# Altium PCB RacerPCB.PcbDoc (part 1 of 2)
Units mm, origin at the board's own origin, x right, y up, seen from the top; angles counter-clockwise.
Board outline 64 x 85 mm, 4 copper layers (Top Side, Ground Plane, Power Plane, Bottom Side), stack 0.844 mm thick; 111 components, 67 nets, 320 pads, 84 vias.
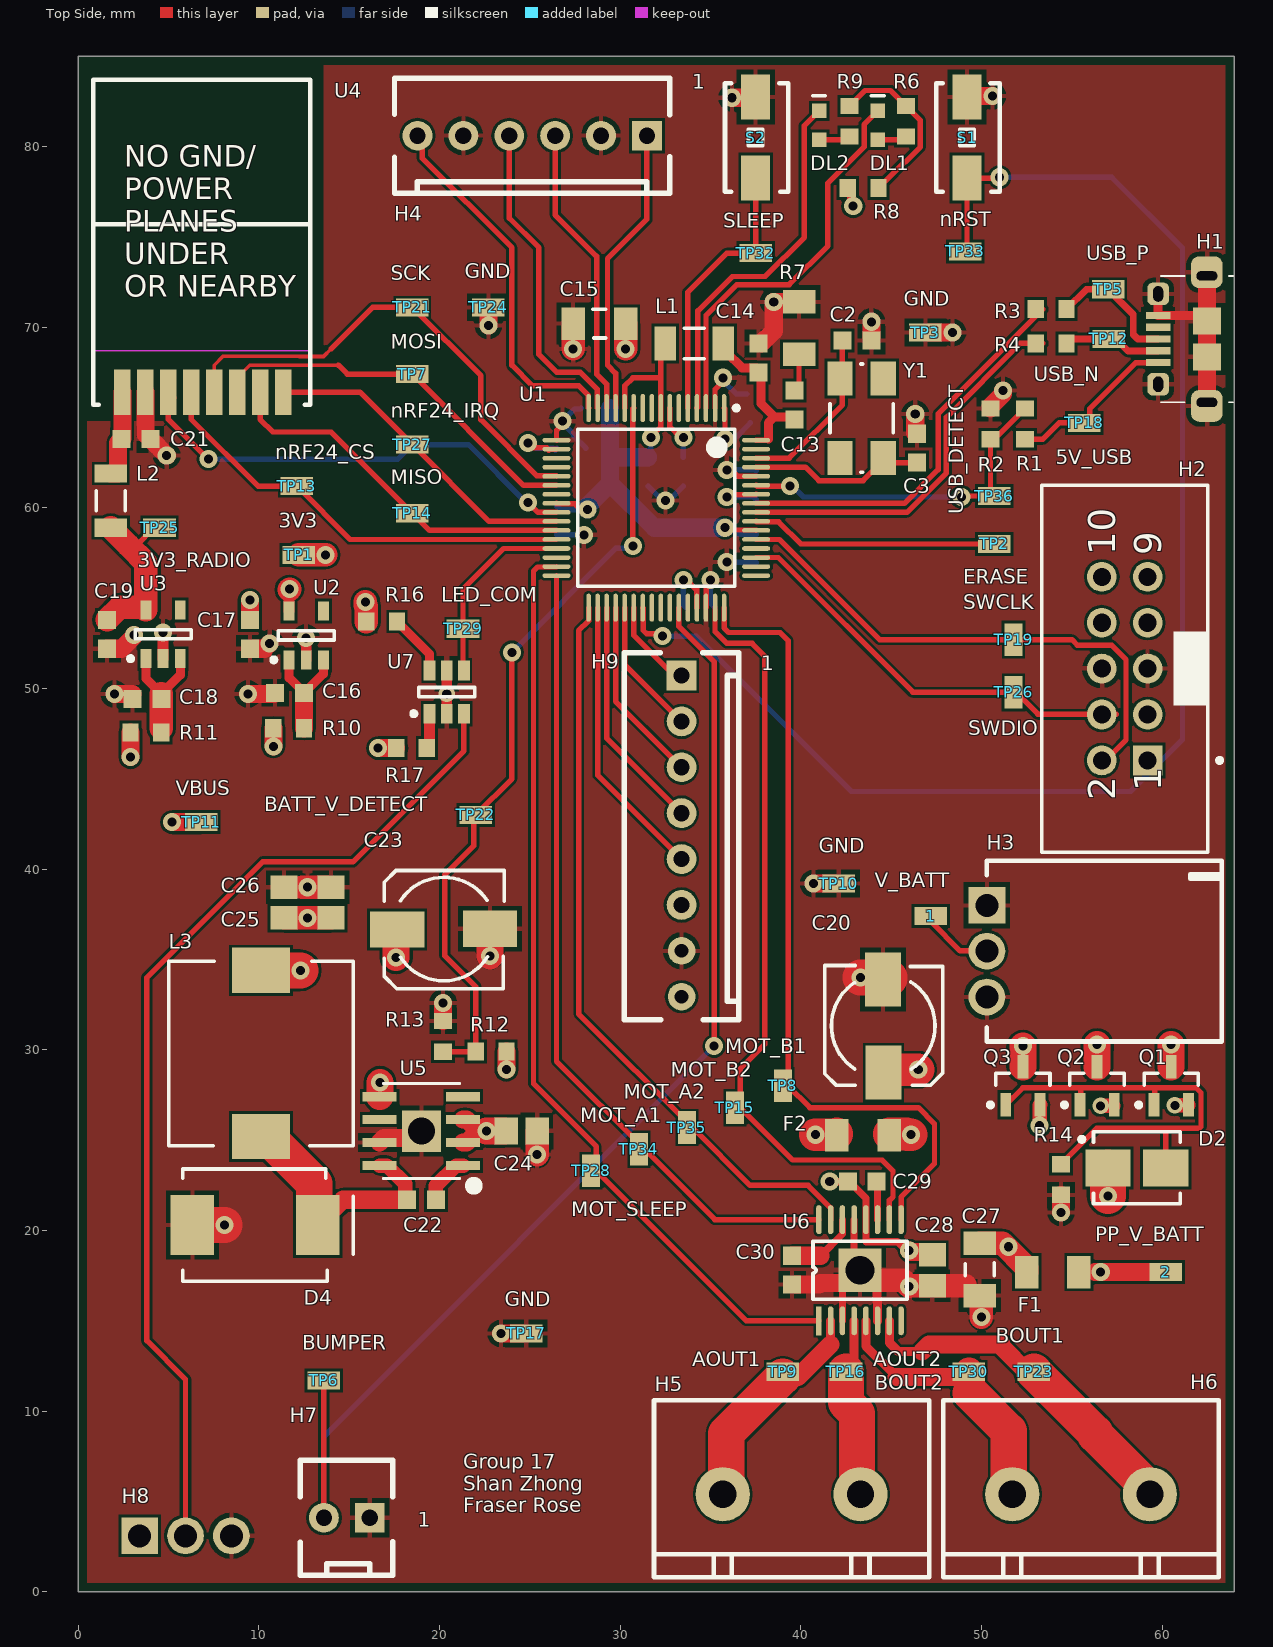
[diagram p0: Top Side view]
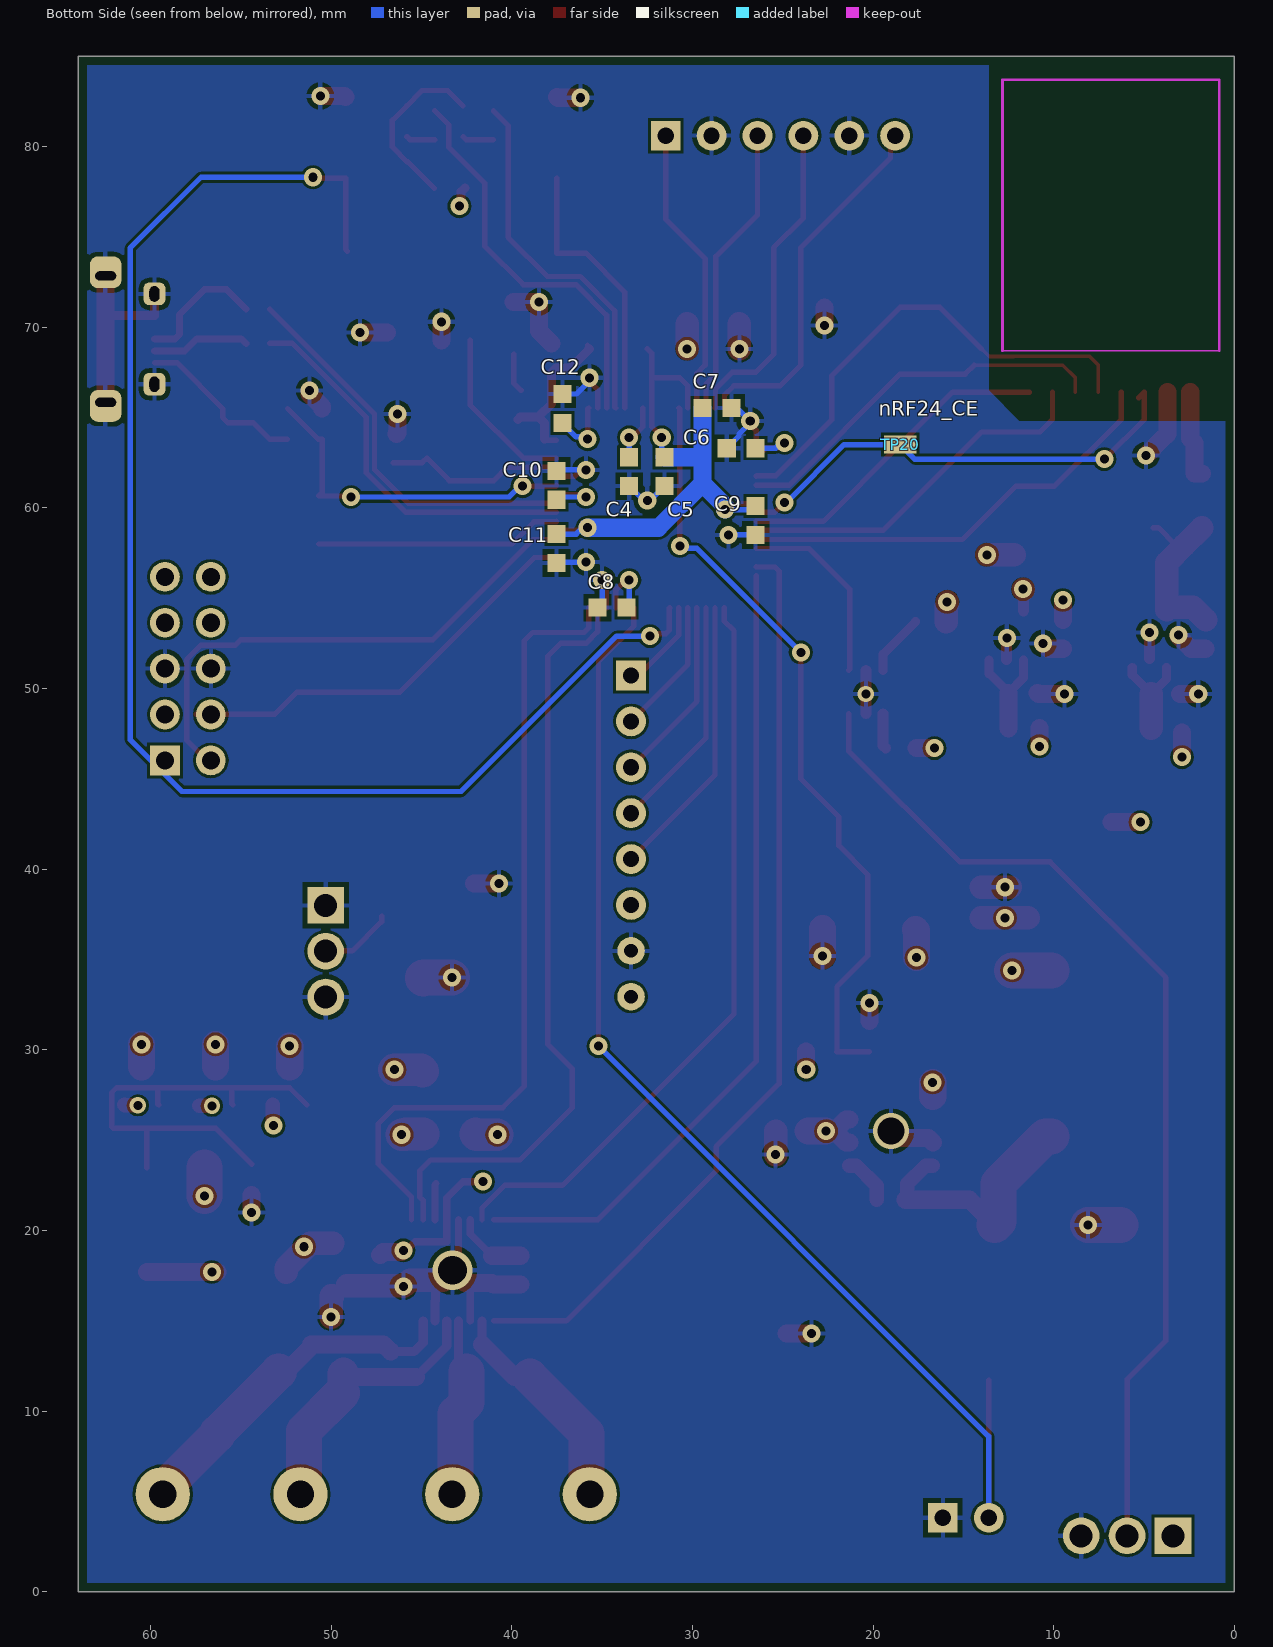
[diagram p1: Bottom Side view, seen from below]
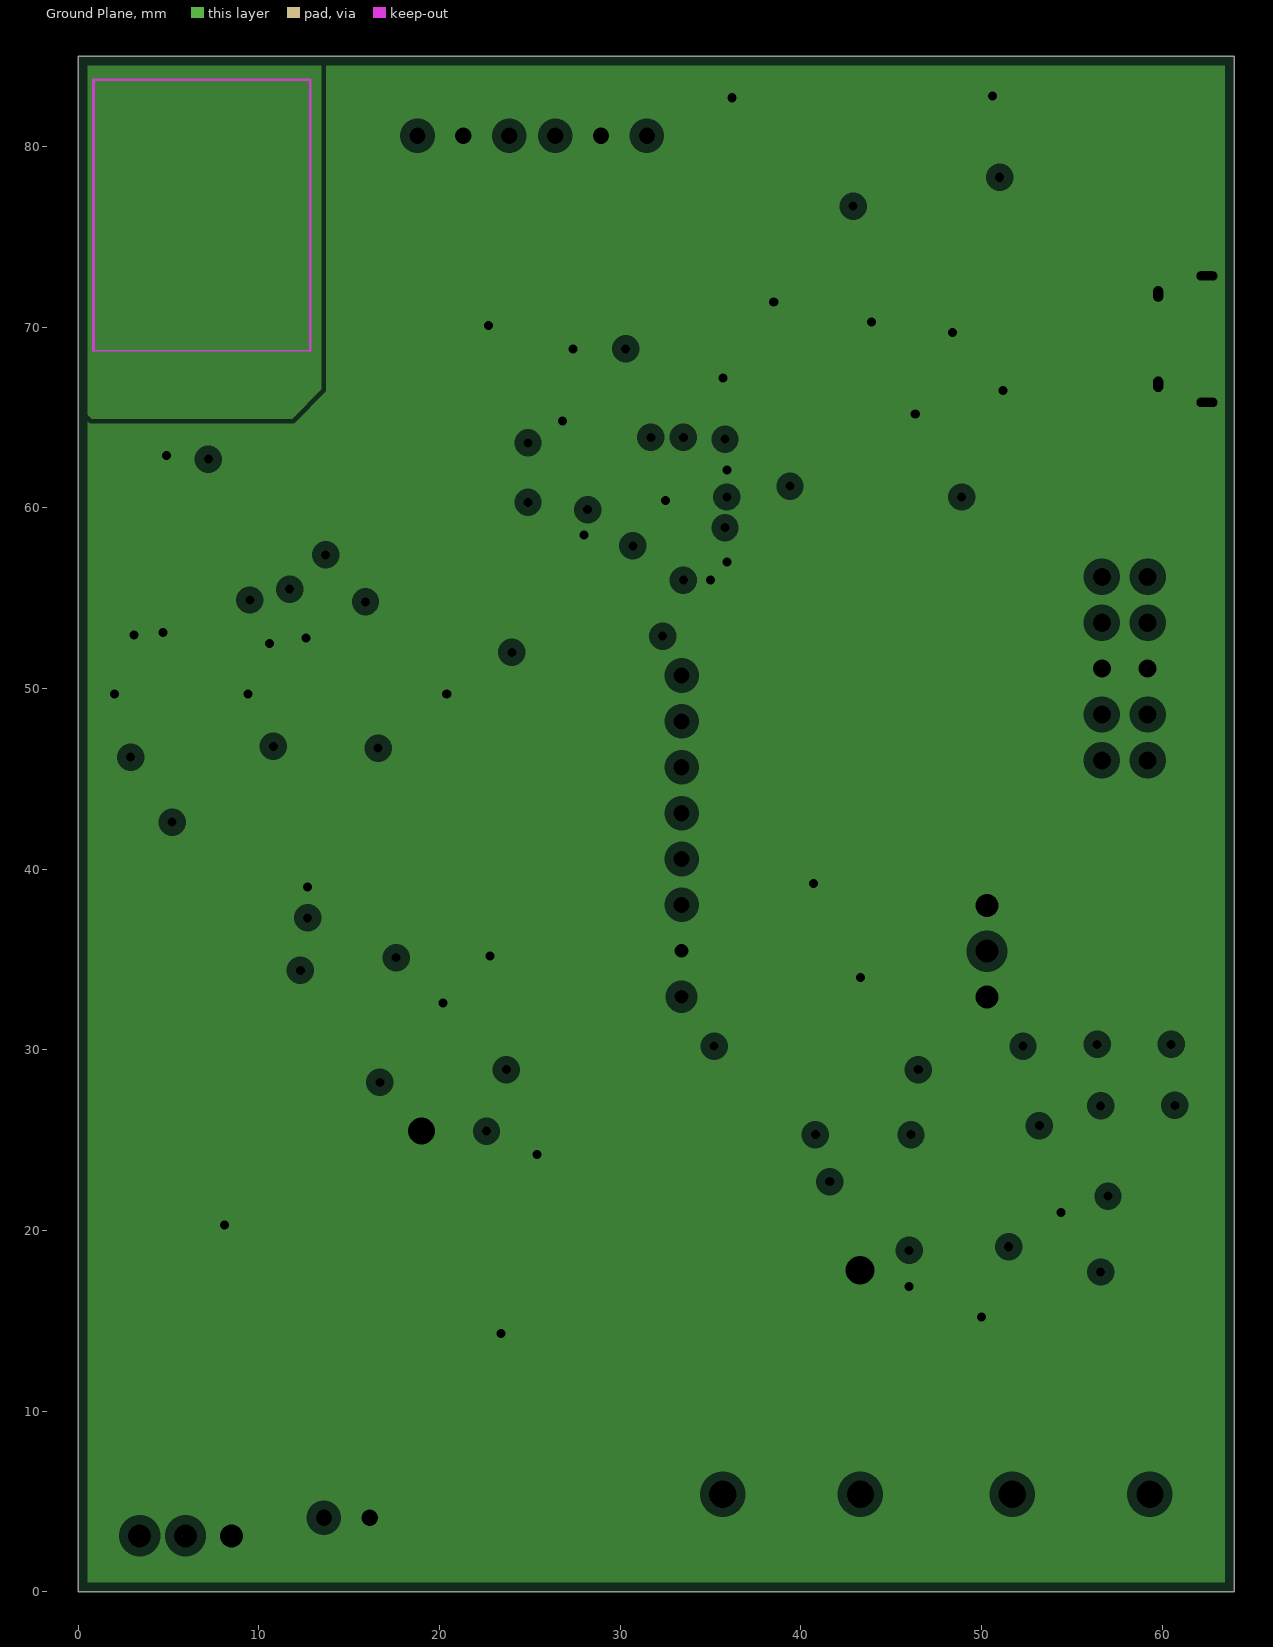
[diagram p2: Ground Plane, clearances drawn from the general rule]
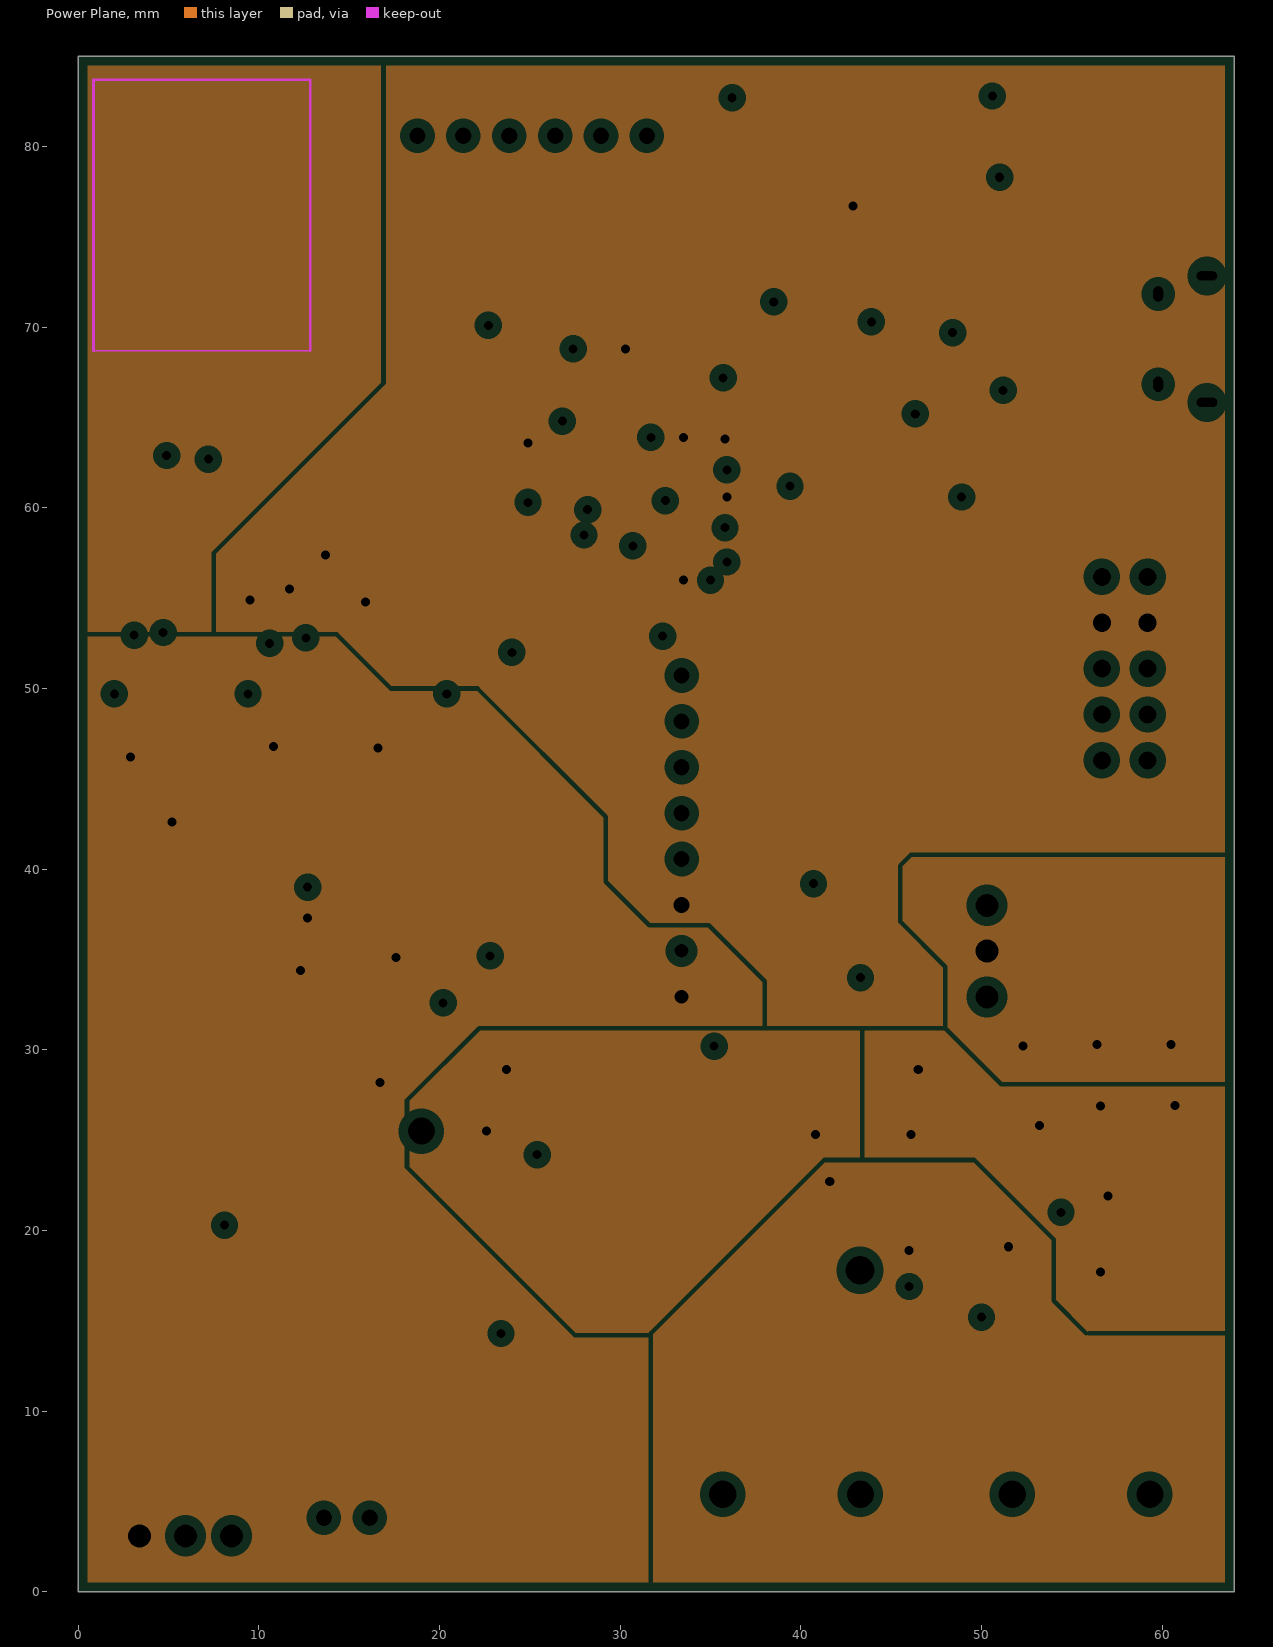
[diagram p3: Power Plane, clearances drawn from the general rule]

## Layer stack, top to bottom
Top Solder: solder mask 0.0102, Solder Resist, Dk 3.5
Top Side: signal copper 0.0356
Dielectric 1: core 0.32, FR-4, Dk 4.8
Ground Plane: plane copper 0.036, net GND
Dielectric 3: prepreg 0.127, Dk 4.2
Power Plane: plane copper 0.036, net (Multiple Nets)
Dielectric 4: core 0.254, Dk 4.2
Bottom Side: signal copper 0.0356
Bottom Solder: solder mask 0.0102, Solder Resist, Dk 3.5

## Board outline
0,85 64,85 64,0 0,0 0,85

## Design rules (kind name [scope] priority, off if disabled: settings)
BoardOutlineClearance [All] p1: gap=0.5 ignorepadtopadclearanceinfootprint=FALSE
Clearance Min_Clearance_Circuit_Labs [All] p1: gap=0.15 ignorepadtopadclearanceinfootprint=FALSE except(0: Arc-Hole Track-Hole SMDPad-Hole THPad-Hole Via-Hole Fill-Hole Poly-Hole Region-Hole Text-Hole)
DiffPairsRouting [All] p1: maxlimit=0.254 minlimit=0.254 mostfreqgap=0.254 toplayer_minwidth=0.381 toplayer_maxwidth=0.381 toplayer_prefwidth=0.381 bottomlayer_minwidth=0.381 bottomlayer_maxwidth=0.381 bottomlayer_prefwidth=0.381 maxuncoupledlength=12.7
FanoutControl Fanout_BGA [IsBGA] p1 off: bgadir=Out bgaviamode=Centered fanoutstyle=Auto fanoutdirection=Alternating viagrid=0.025 // Fanout_BGA (Default Rule)
HoleSize [All] p1: absolutevalues=TRUE maxlimit=10 minlimit=0.3 maxpercent=80.000 minpercent=20.000
MinimumAnnularRing [All] p1: minimumring=0.1
MinimumSolderMaskSliver [All] p1: minsoldermaskwidth=0.1
NetAntennae [All] p1: netantennaetolerance=1
PasteMaskExpansion [All] p1 off: expansion=0.2
PlaneClearance [All] p1: clearance=0.508
PlaneConnect [All] p1: planeconnectstyle=Relief reliefexpansion=0.508 reliefentries=4 reliefconductorwidth=0.254 reliefairgap=0.254
PolygonConnect [All] p1: connectstyle=Relief reliefconductorwidth=0.254 reliefentries=4 polygonreliefangle="90 Angle" airgapwidth=0.254
RoutingVias [All] p1: holewidth=0.5 width=1 viastyle="Through Hole" minholewidth=0.3 minwidth=0.6 maxholewidth=1 maxwidth=2
SMDNeckDown [All] p1 off: percent=50.000
SMDToCorner [All] p1: distance=98425
SMDToPlane [All] p1: distance=1968504
SilkToSolderMaskClearance SilkscreenOverComponentPads [IsPad] p1: minsilkscreentomaskgap=0.254 clearancetoexposedcopper=TRUE
SolderMaskExpansion [All] p1: expansion=0.102
ViasUnderSMD [All] p1: allowed=FALSE
Width [All] p1: maxlimit=2 minlimit=0.15 preferedwidth=0.3
21 further rules are at their usual default settings.

## Classes and differential pairs
component class SAM4s_Schematic: C2 C3 C4 C5 C7 C8 C9 C10 C11 C12 C13 C14 C15 C16 C17 DL1 DL2 H1 H2 L1 R1 R2 R3 R4 R6 R7 R8 R9 R10 S1 S2 TP1 TP2 TP3 TP5 TP6 TP7 TP8 TP9 TP10 TP11 TP12 TP13 TP14 TP15 TP16 TP17 TP18 TP19 TP20 TP21 TP22 TP23 TP24 TP25 TP26 TP27 TP28 TP29 TP30 TP32 TP33 TP34 TP35 TP36 U1 U2 Y1
component class Ancillaries: 1 2 C18 C19 C20 C21 C22 C23 C24 C25 C26 C27 C28 C29 C30 D2 D4 F1 F2 H3 H4 H5 H6 H7 H8 H9 L2 L3 Q1 Q2 Q3 R11 R12 R13 R14 R16 R17 U3 U4 U5 U6 U7
differential pair D: +D_P -D_N

## Components (designator, comment, footprint, x,y, rotation, side; value= is the part's Value field where it differs from the comment)
1 "V_BATT" TP_0603 47.2,37.4 r180 top
2 "PP_V_BATT" TP_0603 60.2,17.7 r180 top
C2 "27pF" CAPC1608N 43.109,69.266 r180 top
C3 "27pF" CAPC1608N 46.42,63.3 r270 top
C4 "100nF" CAPC1608N 33.5,62 r90 bottom
C5 "100nF" CAPC1608N 31.546,62 r90 bottom
C6 "100nF" CAPC1608N 27.3,63.3 r180 bottom
C7 "100nF" CAPC1608N 28.646,65.525 r0 bottom
C8 "100nF" CAPC1608N 34.45,54.475 r180 bottom
C9 "100nF" CAPC1608N 26.5,59.3 r90 bottom
C10 "100nF" CAPC1608N 37.525,61.25 r270 bottom
C11 "100nF" CAPC1608N 37.525,57.75 r90 bottom
C12 "100nF" CAPC1608N 37.2,65.5 r270 bottom
C13 "4.7uF" CAPC1608N 39.654,65.7 r270 top
C14 "100nF" CAPC1608N 37.654,68.3 r270 top
C15 "22uF" CAPC3216N 28.846,70.2 r0 top
C16 "1uF" CAPC1608N 11.7,49.759 r0 top
C17 "1uF" CAPC1608N 9.5,53 r90 top
C18 "1uF" CAPC1608N 3.8,49.427 r0 top
C19 "1uF" CAPC1608N 1.596,53 r90 top
C20 "100uF/16V" NICH-1 44.566,31.33 r270 top
C21 "10uF" CAPC1608N 3.2,63.8 r180 top
C22 "100nF" CAPC1608N 19,21.7 r180 top
C23 "100uF/16V" NICH-1 20.239,36.678 r180 top
C24 "10uF" CAPC2012N 24.55,25.5 r180 top
C25 "33uF" CAPC2012N 14,38.15 r270 top
C26 "33uF" CAPC2012N 11.4,38.15 r270 top
C27 "22uF" CAPC3216N 49.9,17.85 r270 top
C28 "10uF" CAPC2012N 47.279,17.8 r90 top
C29 "10nF" CAPC1608N 43.4,22.7 r180 top
C30 "2.2uF" CAPC1608N 39.521,17.8 r90 top
D2 "DIODE ZENER 5.6V" DO-214AA_SCL 58.6,23.471 r0 top
D4 "SCHOTTKY 30V 4A" SMC 9.792,20.3 r0 top
DL1 "Red" WL-SMCW0603 44.256,81.971 r270 top
DL2 "Dark Green" WL-SMCW0603 41.011,81.971 r270 top
F1 "5A" RESC3216N 53.946,17.7 r180 top
F2 "2A" RESC3216N 43.45,25.27 r180 top
H1 "JS_USB_MICRO_B" FCI_USB_10118194-0001LF 63.929,69.341 r90 top
H2 "Header 5X2 Vert" IDC2.54-V10D 57.93,51.101 r90 top
H3 "Battery_HEADER_3pin" BATT_HEADER_3POS 50.3,35.46 r270 top
H4 "6 Pin Molex KK Hdr" MOLEX_KK_6_HDR 31.48,80.6 r180 top
H5 "TERM_BLK_2POS" TERM_BLK_2POS 43.3,5.4 r180 top
H6 "TERM_BLK_2POS" TERM_BLK_2POS 59.32,5.4 r180 top
H7 "2 Pin Molex KK HDR" MOLEX_KK_2_HDR 16.14,4.1 r180 top
H8 "HEADER_3" HEADER_3POS 5.94,3.1 r0 top
H9 "8 PIN Molex KK Hdr" MOLEX_KK_8_HDR 33.4,50.72 r270 top
L1 "1A max, Idc 0.3R," INDC3216N 34.1,69.1 r180 top
L2 "1A max, Idc 0.3R," INDC3216L 1.8,60.4 r270 top
L3 "IND 5.2UH 6A" INDUCTOR5u2 10.117,29.8 r90 top
Q1 "SSM3J328R,LF" SOT23_N 60.5,28 r90 top
Q2 "SSM3J328R,LF" SOT23_N 56.396,28 r90 top
Q3 "SSM3J328R,LF" SOT23_N 52.291,28 r90 top
R1 "27K" RESC1608N 52.416,64.65 r270 top
R2 "47K" RESC1608N 50.5,64.65 r270 top
R3 "27R" RESC1608N 53.85,71 r180 top
R4 "27R" RESC1608N 53.85,69.1 r180 top
R6 "820R" RESC1608N 45.812,81.4 r90 top
R7 "1R" RESC3216N 39.909,69.954 r270 top
R8 "0R" RESC1608N 43.45,77.7 r180 top
R9 "390R" RESC1608N 42.7,81.4 r270 top
R10 "0R" RESC1608N 11.65,47.8 r180 top
R11 "0R" RESC1608N 3.75,47.573 r180 top
R12 "4K7" RESC1608N 22.854,29.9 r0 top
R13 "3K3" RESC1608N 20.2,30.741 r270 top
R14 "270R" RESC1608N 54.4,22.821 r270 top
R16 "0R" RESC1608N 16.8,53.7 r180 top
R17 "0R" RESC1608N 18.45,46.7 r180 top
S1 "nRST" EVQPNF05M 49.2,80.5 r270 top
S2 "SLEEP" EVQPNF05M 37.5,80.5 r270 top
TP1 "3V3" TP_0603 12.2,57.4 r0 top
TP2 "ERASE" TP_0603 50.7,58 r0 top
TP3 "GND" TP_0603 46.9,69.7 r0 top
TP5 "USB_P" TP_0603 57.004,72.1 r0 top
TP6 "BUMPER" TP_0603 13.6,11.7 r0 top
TP7 "MOSI" TP_0603 18.5,67.4 r0 top
TP8 "MOT_B1" TP_0603 39.003,28 r90 top
TP9 "AOUT1" TP_0603 39,12.181 r0 top
TP10 "GND" TP_0603 42.1,39.2 r180 top
TP11 "VBUS" TP_0603 6.8,42.6 r0 top
TP12 "USB_N" TP_0603 57.042,69.354 r180 top
TP13 "nRF24_CS" TP_0603 12.1,61.2 r180 top
TP14 "MISO" TP_0603 18.5,59.7 r180 top
TP15 "MOT_B2" TP_0603 36.348,26.8 r90 top
TP16 "AOUT2" TP_0603 42.5,12.181 r180 top
TP17 "GND" TP_0603 24.8,14.3 r180 top
TP18 "5V_USB" TP_0603 55.7,64.7 r180 top
TP19 "SWCLK" TP_0603 51.776,52.7 r90 top
TP20 "nRF24_CE" TP_0603 18.5,63.5 r180 bottom
TP21 "SCK" TP_0603 18.5,71.1 r180 top
TP22 "BATT_V_DETECT" TP_0603 22,43 r180 top
TP23 "BOUT1" TP_0603 52.9,12.181 r180 top
TP24 "GND" TP_0603 22.7,71.1 r180 top
TP25 "3V3_RADIO" TP_0603 4.5,58.9 r180 top
TP26 "SWDIO" TP_0603 51.776,49.8 r90 top
TP27 "nRF24_IRQ" TP_0603 18.5,63.5 r180 top
TP28 "MOT_SLEEP" TP_0603 28.385,23.3 r90 top
TP29 "LED_COM" TP_0603 21.3,53.309 r180 top
TP30 "BOUT2" TP_0603 49.3,12.181 r180 top
TP32 "SLEEP_BUT" TP_0603 37.5,74.1 r180 top
TP33 "nRST" TP_0603 49.1,74.2 r180 top
TP34 "MOT_A1" TP_0603 31.04,24.5 r90 top
TP35 "MOT_A2" TP_0603 33.694,25.7 r90 top
TP36 "USB_DETECT" TP_0603 50.7,60.654 r180 top
U1 "ATSAM4S8BA-ANR" LQFP64_L 32,60 r270 top locked
U2 "CAT6219-330TDGT3" SOT95P280X145-5N 12.625,52.938 r90 top
U3 "CAT6219-330TDGT3" SOT95P280X145-5N 4.7,53 r90 top
U4 "nRF24 SMD" NRF24 0.843,65.7 r0 top
U5 "ADP2302ARDZ-5.0 BUCK" RD_8_1 19,25.5 r180 top locked value=Value
U6 "DRV8833" HTSOP16 41,15 r90 top locked
U7 "SN74LVC1T45" SOT23-6_N 20.4,49.804 r90 top
Y1 "12MHz" 6.0X3.5-4 43.364,64.96 r90 top

## Footprints (in the part's own frame and the unit in brackets; to place one, negate y for a bottom-side part, rotate by r counter-clockwise, add the part's x,y. Pads: shape width x height; smd on the part's side, far side on the other; paste and mask are expansions set on the pad)
6.0X3.5-4 [mm] "4 SMD 6.0X3.5 mm No Lead Crystal"
  rect 1.9x1.4 smd: 1(-2.2,-1.2) 2(2.2,-1.2) 3(2.2,1.2) 4(-2.2,1.2)
  silkscreen extent -3,-1.75 3,1.75, body extent -3,-1.75 3,1.75, height 1.2
BATT_HEADER_3POS [mil]
  rect 80x80 hole 50: 1(-100,0)
  round 80 hole 50: 2(0,0) 3(100,0)
  silkscreen extent -197,0 197,512
CAPC1608N [mm] "Chip Capacitor, Body 1.6x0.8mm, IPC Medium Density"
  rect 1x1 smd: 1(-0.8,0) 2(0.8,0)
  body extent -0.87,-0.48 0.87,0.48, height 0.85
CAPC2012N [mm] "Chip Capacitor, Body 2.0x1.3mm, IPC Medium Density"
  rect 1.3x1.5 smd: 1(-0.85,0) 2(0.85,0)
  body extent -1.1,-0.72 1.1,0.72, height 1.1
CAPC3216N [mm] "Chip Capacitor, Body 3.2x1.6mm, IPC Medium Density"
  rect 1.3x1.8 smd: 1(-1.45,0) 2(1.45,0)
  silkscreen extent -0.35,-0.8 0.35,0.8, body extent -1.7,-0.9 1.7,0.9, height 1.35
DO-214AA_SCL [mm] "Molded Diode, 2-Leads, Body 4.40x3.62mm, IPC Medium Density"
  rect 2.5x2.05 smd: 1(-1.6,0) 2(1.6,0)
  silkscreen extent -3.17,-2 2.4,2
EVQPNF05M [mm] "Panansonic light touch SMD push button switch"
  rect 2.5x1.6 smd: 1(-2.25,0) 2(2.25,0)
  silkscreen extent -3,-1.7 3,1.8, body extent -3,-1.7 3,1.8, height 5
FCI_USB_10118194-0001LF [mm] "Micro USB B Type Receptacle"
  rect 0.4x1.35 smd mask+0.07: 1(-1.3,4.15) 2(-0.65,4.15) 3(0,4.15) 4(0.65,4.15) 5(1.3,4.15)
  rrect50% 1.75x1.75 hole 0.5 slot 1.15 at 90 deg copper offset -0.2,0 paste+0 mask+0.1: 6(-3.5,1.45)
  rrect50% 1.25x1.2 hole 0.55 slot 0.85 at 0 deg: 6(-2.5,4.15) 6(2.5,4.15)
  rect 1.5x1.55 smd: 6(-1,1.45) 6(1,1.45)
  rrect50% 1.75x1.75 hole 0.5 slot 1.15 at 90 deg copper offset 0.2,0 paste+0 mask+0.1: 6(3.5,1.45)
  silkscreen extent -3.5,0 3.5,4
HEADER_3POS [mil]
  rect 80x80 hole 50: 1(-100,0)
  round 80 hole 50: 2(0,0) 3(100,0)
HTSOP16 [mm]
  rect 1.6x0.3 smd: 1(0,0)
  oval 1.6x0.3 smd: 2(0,-0.65) 3(0,-1.3) 4(0,-1.95) 5(0,-2.6) 6(0,-3.25) 7(0,-3.9) 8(0,-4.55) 9(5.6,-4.55) 10(5.6,-3.9) 11(5.6,-3.25) 12(5.6,-2.6) 13(5.6,-1.95) 14(5.6,-1.3) 15(5.6,-0.65) 16(5.6,0)
  rect 2.4x2.4 smd paste-0.5: 17(2.8,-2.275)
  silkscreen extent 1.2,-4.88 4.4,0.33
IDC2.54-V10D [mm] "Connector; IDC, Low Profile Male Header, Thru-Hole; 10 Position; Vertical; Pitch 2.54 mm; Body 20.32 x 9.2 x 9.45 mm (LxWxH)"
  rect 1.65x1.65 hole 1: 1(-5.08,-1.27)
  round 1.65 hole 1: 2(-5.08,1.27) 3(-2.54,-1.27) 4(-2.54,1.27) 5(0,-1.27) 6(0,1.27) 7(2.54,-1.27) 8(2.54,1.27) 9(5.08,-1.27) 10(5.08,1.27)
  silkscreen extent -10.16,-5.38 10.16,4.6, body extent -10.16,-4.6 10.16,4.6, height 9.45
INDC3216L [mm] "Chip Inductor, Body 3.2x1.6mm, IPC High Density"
  rect 1x1.8 smd: 1(-1.5,0) 2(1.5,0)
  silkscreen extent -0.55,-0.8 0.55,0.8, body extent -1.75,-0.95 1.75,0.95, height 1.9
INDC3216N [mm] "Chip Inductor, Body 3.2x1.6mm, IPC Medium Density"
  rect 1.2x1.9 smd: 1(-1.6,0) 2(1.6,0)
  silkscreen extent -0.55,-0.85 0.55,0.85, body extent -1.75,-0.95 1.75,0.95, height 1.9
INDUCTOR5u2 [mm]
  rect 2.5x3.2 smd: 1(-4.6,0) 2(4.6,0)
  silkscreen extent -5.1,-5.1 5.1,5.1
LQFP64_L [mm] "Thin QFP, 64-Leads, Body 10x10mm, Pitch 0.5mm, IPC High Density"
  oval 1.55x0.25 smd mask+0.07: 1(-5.525,3.75) 2(-5.525,3.25) 3(-5.525,2.75) 4(-5.525,2.25) 5(-5.525,1.75) 6(-5.525,1.25) 7(-5.525,0.75) 8(-5.525,0.25) 9(-5.525,-0.25) 10(-5.525,-0.75) 11(-5.525,-1.25) 12(-5.525,-1.75) 13(-5.525,-2.25) 14(-5.525,-2.75) 15(-5.525,-3.25) 16(-5.525,-3.75) 33(5.525,-3.75) 34(5.525,-3.25) 35(5.525,-2.75) 36(5.525,-2.25) 37(5.525,-1.75) 38(5.525,-1.25) 39(5.525,-0.75) 40(5.525,-0.25) 41(5.525,0.25) 42(5.525,0.75) 43(5.525,1.25) 44(5.525,1.75) 45(5.525,2.25) 46(5.525,2.75) 47(5.525,3.25) 48(5.525,3.75)
  oval 0.25x1.55 smd mask+0.07: 17(-3.75,-5.525) 18(-3.25,-5.525) 19(-2.75,-5.525) 20(-2.25,-5.525) 21(-1.75,-5.525) 22(-1.25,-5.525) 23(-0.75,-5.525) 24(-0.25,-5.525) 25(0.25,-5.525) 26(0.75,-5.525) 27(1.25,-5.525) 28(1.75,-5.525) 29(2.25,-5.525) 30(2.75,-5.525) 31(3.25,-5.525) 32(3.75,-5.525) 49(3.75,5.525) 50(3.25,5.525) 51(2.75,5.525) 52(2.25,5.525) 53(1.75,5.525) 54(1.25,5.525) 55(0.75,5.525) 56(0.25,5.525) 57(-0.25,5.525) 58(-0.75,5.525) 59(-1.25,5.525) 60(-1.75,5.525) 61(-2.25,5.525) 62(-2.75,5.525) 63(-3.25,5.525) 64(-3.75,5.525)
  silkscreen extent -5.65,-4.35 4.35,4.55, body extent -5,-5 5,5, height 1.6
MOLEX_KK_2_HDR [mil] "MOLEX_KK_2_HDR"
  rect 65x65 hole 35.43: 1(0,0)
  round 65 hole 35.43: 2(100,0)
  silkscreen extent -50,-125 152,125, body extent -44,-121 146,119, height 630
MOLEX_KK_6_HDR [mil] "MOLEX_KK_6_HDR"
  rect 65x65 hole 35.43: 1(0,0)
  round 65 hole 35.43: 2(100,0) 3(200,0) 4(300,0) 5(400,0) 6(500,0)
  silkscreen extent -50,-125 550,125, body extent -44,-119 543,119, height 630
MOLEX_KK_8_HDR [mil] "MOLEX_KK_8_HDR"
  rect 65x65 hole 35.43: 1(0,0)
  round 65 hole 35.43: 2(100,0) 3(200,0) 4(300,0) 5(400,0) 6(500,0)
  round 60 hole 30: 7(600,0) 8(700,0)
  silkscreen extent -50,-125 750,125, body extent -43,-119 743,119, height 630
NICH-1 [mm] "Electrolytic capacitor"
  rect 3x2 smd: 1(-2.561,-0.022) 2(2.584,0.011)
  silkscreen extent -3.34,-3.25 3.3,3.3, body extent -3.2,-3.2 3.2,3.2, height 5.3
NRF24 [mm]
  rect 0.9x2.5 smd: 1(1.6,0.7) 2(2.871,0.7) 3(4.143,0.7) 4(5.414,0.7) 5(6.686,0.7) 6(7.957,0.7) 7(9.229,0.7) 8(10.5,0.7)
  Keep-Out Layer lines w0.1: 0,3 12,3
  Keep-Out Layer lines w0.15: 0,3 0,18 12,18 12,3
  silkscreen extent 0,0 12,18
RD_8_1 [mil]
  rect 74x20 smd paste+0 mask+0: 1(-91,75) 2(-91,25) 3(-91,-25) 4(-91,-75) 5(91,-75) 6(91,-25) 7(91,25) 8(91,75)
  rect 84.65x90 smd paste-44.5 mask+0: EPAD(0,0)
  silkscreen extent -118,-104 84,123, body extent 0,0 10,10, height 10
RESC1608N [mm] "Chip Resistor, Body 1.6x0.8mm, IPC Medium Density"
  rect 0.9x1 smd: 1(-0.85,0) 2(0.85,0)
  body extent -0.85,-0.48 0.85,0.48, height 0.6
RESC3216N [mm] "Chip Resistor, Body 3.2x1.6mm, IPC Medium Density"
  rect 1.3x1.8 smd: 1(-1.45,0) 2(1.45,0)
  body extent -1.68,-0.87 1.68,0.87, height 0.71
SMC [mm] "DO-214-AB/SMC; 2 C-Bend Leads; Body 7.9 x 5.9 mm, inc. leads (LxW)"
  rect 2.4x3.3 smd: 1(-3.475,0) 2(3.475,0)
  silkscreen extent -4,-3.1 5.43,3.1
SOT23-6_N [mm]
  rect 1.1x0.65 smd: 1(-1.2,0.95) 2(-1.2,0) 3(-1.2,-0.95) 4(1.2,-0.95) 5(1.2,0) 6(1.2,0.95)
  silkscreen extent -1.32,-1.55 0.25,1.95, body extent -0.9,-1.55 0.9,1.55, height 1.45
SOT23_N [mm] "SOT23, 3-Leads, Body 2.9x1.3mm, Pitch 0.95mm, Lead Span 2.3mm, IPC Medium Density"
  rect 1.3x0.6 smd: 1(-1.05,0.95) 2(-1.05,-0.95) 3(1.05,0)
  silkscreen extent -1.17,-1.5 0.7,1.92, body extent -0.7,-1.5 0.7,1.5, height 1.1
SOT95P280X145-5N [mm] "SOT23, 5-Leads, Body 2.90x2.80mm, Pitch 0.95mm, IPC Medium Density"
  rect 1.05x0.6 smd: 1(-1.35,0.95) 2(-1.35,0) 3(-1.35,-0.95) 4(1.35,-0.95) 5(1.35,0.95)
  silkscreen extent -1.47,-1.55 0.25,1.92, body extent -0.87,-1.52 0.87,1.53, height 1.45
TERM_BLK_2POS [mm]
  round 3 hole 1.5: 1(0,0) 2(7.62,0)
  silkscreen extent -3.81,-5.2 11.43,4.6
TP_0603 [mm] "TestPoint 0603"
  rect 1.8x1 smd: 1(0,0)
  body extent -1,-0.6 1,0.6, height 0.9
WL-SMCW0603 [mm] "2.4 x 0.8 x 0.7mm LED"
  rect 0.8x0.8 smd: 1(0,0) 2(1.6,0)
  silkscreen extent -0.85,-0.35 -0.85,0.35

## Part data
1 2 TP1 TP2 TP3 TP5 TP6 TP7 TP8 TP9 TP10 TP11 TP12 TP13 TP14 TP15 TP16 TP17 TP18 TP19 TP20 TP21 TP22 TP23 TP24 TP25 TP26 TP27 TP28 TP29 TP30 TP32 TP33 TP34 TP35 TP36: library part TP_0603, "Test Point 1.65X0.9X1.2mm SMD", Manufacturer="TE Connectivity AMP Connectors", Manufacturer Part Number=1625854-3, Supplier Part Number 1=A106145CT-ND, Mounting Type="Surface Mount", Supplier 1=Digi-Key, Terminal="0.063\" x 0.031\" x 0.045\" (1.60mm x 0.80mm x 1.15mm)", Type="PC Test Point"
C2 C3: library part CC_27pF_0603, "CAP CER 27pF NPO/COG +-5% 50V 0603", Code_IPC="1608 [0603]", PackageReference=0603, Storage Location="PCB Assembly WS", Supplier="ECE Dept"
C4 C5 C6 C7 C8 C9 C10 C11 C12 C14 C22: library part CC_100nF_0603, "CAP CER 100nF X7R +-10% 50V 0603", Code_IPC="1608 [0603]", PackageReference=0603, Storage Location="PCB Assembly WS", Supplier="ECE Dept"
C13: library part CC_4.7uF_0603, "CAP CER 4.7uF X5R +-20%  10V 0603", Max Voltage=10V, Code_IPC=2012[0805], Note="Footprint corresponds to dimensions for bulk cassette packaging. This case size has tightened tolerances.", PackageReference=0805, Storage Location="PCB Assembly WS", Supplier="ECE Dept"
C15 C27: library part CC_22uF_1206, "CAP CER 22uF Y5V -20% +80% 10V 1206", Dielectric=Y5V, Max Voltage=10V, Storage Location="PCB Assembly WS", Supplier="ECE Dept"
C16 C17 C18 C19: library part CC_1uF_0603, "CAP CER 1uF Y5V -20% +80% 16V 0603", Max Voltage=16V, Code_IPC="1608 [0603]", PackageReference=0603, Storage Location="PCB Assembly WS", Supplier="ECE Dept"
C20 C23: library part CA_100uF_16V, "CAP ALUM 100uF 16V SMD", Manufacturer=Nichcon, Manufacturer PN=UWX1C101MCL1GB, Supplier Part Number 1=1870677, Storage Location="PCB Assembly WS", Supplier="ECE Dept", Supplier 1=Farnell, Supplier 2=Digi-Key, Supplier Part Number 2=493-2105-1-ND
C21: library part CC_10uF_0603, "CAP CER 10UF X5R +-20% 6V3 0603", Voltage - Rated=6.3V, Storage Location="PCB Assembly WS", Supplier="ECE Dept"
C24 C28: library part CC_10uF_16V_0805, "CAP CER 10uF X5R 16V 0805", Manufacturer="Samsung Electro-Mechanics", Manufacturer Part Number=CL21A106KOQNNWE, Max Voltage=16V, Operating Temperature="-55°C ~ 85°C", Package / Case="0805 (2012 Metric)", Ratings=-, Supplier Part Number 1=1276-2894-1-ND, Temperature Coefficient=X5R, Tolerance=±10%, Applications="General Purpose", Category=Capacitors, Code_IPC=2012[0805], ComponentLink1Description=http://www.samsungsem.com/kr/support/product-search/mlcc/CL21A106KOQNNWE.jsp, ComponentLink1URL=http://www.samsungsem.com/kr/support/product-search/mlcc/CL21A106KOQNNWE.jsp, Features=-, Height - Seated (Max)=-, Lead Spacing=-, Lead Style=-, Mounting Type="Surface Mount, MLCC", Note="Footprint corresponds to dimensions for bulk cassette packaging. This case size has tightened tolerances.", Notification="Current market demand for these product types have resulted in fluctuating and extending lead times. Lead times may differ.", PackageReference=0805, Packaging="Cut Tape (CT)", Part Status=Active, Pricing 1="1=0.35, 10=0.25, 100=0.1178, 500=0.08254, 1000=0.06831 (NZD)", RoHS="RoHS Compliant", Size / Dimension="0.079\" L x 0.049\" W (2.00mm x 1.25mm)", Stock 1=20000, Supplier 1=Digi-Key, Thickness (Max)="0.055\" (1.40mm)", Voltage - Rated=16V
C25 C26: library part CC_33uF_6V3_0805, "CAP CER 33uF X5R 6V3 0805", Manufacturer="TDK Corporation", Manufacturer Part Number=C2012X5R0J336M125AC, Operating Temperature="-55°C ~ 85°C", Package / Case="0805 (2012 Metric)", Ratings=-, Supplier Part Number 1=445-5986-1-ND, Temperature Coefficient=X5R, Tolerance=±20%, Voltage - Rated=6.3V, Applications="General Purpose", Category=Capacitors, ComponentLink1Description=https://product.tdk.com/info/en/catalog/datasheets/mlcc_commercial_general_en.pdf, ComponentLink1URL=https://product.tdk.com/info/en/catalog/datasheets/mlcc_commercial_general_en.pdf, Failure Rate=-, Features="Low ESL", Height - Seated (Max)=-, Lead Spacing=-, Lead Style=-, Mounting Type="Surface Mount, MLCC", Notification="Current market demand for these product types have resulted in fluctuating and extending lead times. Lead times may differ.", Packaging="Cut Tape (CT)", Part Status=Active, Pricing 1="1=1.65, 10=1.262, 100=0.9023, 500=0.6985, 1000=0.60149 (NZD)", RoHS="RoHS Compliant", Size / Dimension="0.079\" L x 0.049\" W (2.00mm x 1.25mm)", Stock 1=20000, Supplier 1=Digi-Key, Thickness (Max)="0.057\" (1.45mm)"
C29: library part CC_10nF_0603, "CAP CER 10nF X7R +-10% 50V 0603", Code_IPC="1608 [0603]", PackageReference=0603, Storage Location="PCB Assembly WS", Supplier="ECE Dept"
C30: library part CC_2.2uF_0603, "CAP CER 2.2uF X5R +-20% 10V 0603", Max Voltage=10V, Code_IPC="1608 [0603]", PackageReference=0603, Storage Location="PCB Assembly WS", Supplier="ECE Dept"
D2: library part SMBJ5339B-TP, "DIODE ZENER 5.6V 5W DO214AA", Base Part Number=SMBJ5339, Manufacturer="Micro Commercial Co", Operating Temperature="-55°C ~ 150°C", Package / Case="DO-214AA, SMB", Supplier Device Package="DO-214AA (SMB)", Supplier Part Number 1=SMBJ5339B-TPMSCT-ND, Tolerance=±5%, Category="Discrete Semiconductor Products", ComponentLink1Description=http://www.mccsemi.com/up_pdf/SMBJ5338B-SMBJ5388B(SMB).pdf, ComponentLink1URL=http://www.mccsemi.com/up_pdf/SMBJ5338B-SMBJ5388B(SMB).pdf, Manufacturer Part Number=SMBJ5339B-TP, Mounting Type="Surface Mount", Packaging="Cut Tape (CT)", Part Status=Active, Pricing 1="1=1.47, 10=1.277, 25=1.1312, 100=0.9853, 250=0.85764, 500=0.72988, 1000=0.58391 (NZD)", RoHS="RoHS Compliant", Stock 1=85990, Supplier 1=Digi-Key
D4: library part MBRS330T3G, "DIODE SCHOTTKY 30V 4A SMC", Base Part Number=MBRS330, Capacitance @ Vr, F=-, Current - Average Rectified (Io)=4A, Manufacturer="ON Semiconductor", Operating Temperature - Junction="-65°C ~ 150°C", Package / Case="DO-214AB, SMC", Supplier Device Package=SMC, Supplier Part Number 1=MBRS330T3GOSCT-ND, Category="Discrete Semiconductor Products", ComponentLink1Description=http://www.onsemi.com/pub/Collateral/MBRS340T3-D.PDF, ComponentLink1URL=http://www.onsemi.com/pub/Collateral/MBRS340T3-D.PDF, Diode Type=Schottky, Manufacturer Part Number=MBRS330T3G, Mounting Type="Surface Mount", Packaging="Cut Tape (CT)", Part Status=Active, Pricing 1="1=0.93, 10=0.79, 100=0.5902, 500=0.46368, 1000=0.35829 (NZD)", RoHS="RoHS Compliant", Speed="Fast Recovery =< 500ns, > 200mA (Io)", Stock 1=8919, Supplier 1=Digi-Key
DL1: library part DL_150060RS75000, "LED Red 250mcd 0603 SMD", Forward Current If=30, Forward Voltage=2, Manufacturer="WURTH ELEKTRONIK", Manufacturer Part Number=150060RS75000, Supplier Part Number 1=2322071, LED Colour=Red, LED Mounting=SMD, Lens Shape=Rectangular, Luminous Intensity=250, Storage Location="PCB Assembly WS", Supplier="ECE Dept", Supplier 1=Farnell, Viewing Angle=140°, Wavelength Typ=625
DL2: library part DL_150060GS75000, "LED Dk Green 430mcd 0603 SMD", Forward Current If=30, Forward Voltage=3.2, Manufacturer="WURTH ELEKTRONIK", Manufacturer Part Number=150060GS75000, Supplier Part Number 1=2322070, LED Colour="Dark Green", LED Mounting=SMD, Lens Shape=Rectangular, Luminous Intensity=430, Storage Location="PCB Assembly WS", Supplier="ECE Dept", Supplier 1=Farnell, Viewing Angle=140°, Wavelength Typ=520
F1: library part FS_Fuse_5.0A, "Fuse 5.0A Fast Acting 1206 SMD", Case/Package=1206, Case Code (Metric)=3216, DC Cold Resistance=19mR, Manufacturer="Bel TRP", Manufacturer Part Number=C1F5, Max Operating Temperature=125°C, Min Operating Temperature=-55°C, Supplier Part Number 1=507-1886-1-ND, Voltage Rating=125V, Voltage Rating (DC)=63V, Approvals=CE,cURus, Case Code (Imperial)=1206, ComponentLink1Description=http://www.farnell.com/datasheets/2571625.pdf, ComponentLink1URL=http://www.farnell.com/datasheets/2571625.pdf, ComponentLink2Description=http://belfuse.com/pdfs/C1F.pdf, ComponentLink2URL=http://belfuse.com/pdfs/C1F.pdf, ComponentLink3Description=http://www.mouser.com/ds/2/643/C1F-594910.pdf, ComponentLink3URL=http://www.mouser.com/ds/2/643/C1F-594910.pdf, ComponentLink4Description=https://belfuse.com/resources/StewartConnector/C1F.pdf, ComponentLink4URL=https://belfuse.com/resources/StewartConnector/C1F.pdf, Contact Plating=Nickel,Tin, Current Rating=5A, Fuse Type="Board Mount (Cartridge Style Excluded)", Length=0.126inch, Mount="Surface Mount", Number of Pins=2, Packaging="Tape and Reel", Pricing 1="1=0.32, 5=0.312, 10=0.298, 50=0.2662, 100=0.2479, 250=0.22032, 500=0.1836, 1000=0.17442 (USD)", Stock 1=725, Supplier 1=Digi-Key, Supplier 2=Element14, Supplier Part Number 2=2848595, Voltage Rating (AC)=125V, Width=0.062inch
F2: library part FS_Fuse_2.0A, "Fuse 2.0A Very Fast Acting 1206 SMD", Manufacturer=MULTICOMP, Manufacturer Part Number="MC12CF 002", Supplier Part Number 1=1841029, Manufacturer PN="MC12CF 002", Storage Location="PCB Assembly WS", Supplier="ECE Dept", Supplier 1=Farnell
H1: library part JS_USB_MICRO_B_SMT, "CONN USB MICRO B RECPT SMT R/A", Manufacturer=FCI, Manufacturer Part Number=10118194-0001LF, Supplier Part Number 1=609-4618-1-ND, Features="Shielded, Solder Retention", Gender=Receptacle, Mounting Type="Surface Mount, Right Angle, Horizontal", Number of Contacts=5, Specifications="USB 2.0", Supplier 1=Digi-Key
H2: library part JA_HDR_IDC_5X2_VERT, "IDC Header, 2,54mm, 10-Pin, Vert", Supplier Part Number 1=1096985, Storage Location="ECE Dept Store", Supplier="ECE Dept", Supplier 1=Farnell
H3 H8: "3Pin Header 2.54mm spacing"
H4: library part JA_MOLEX_KK_6POS, "CONN HEADER 6POS 2.54mm VERT_Thru Hole", Supplier Part Number 1=1462922, Storage Location="ECE Dept Store", Supplier="ECE Dept", Supplier 1=Farnell
H5 H6: "2 Position Terminal Block 7.62mm spacing"
H7: library part JA_MOLEX_KK_2POS, "CONN HEADER 2POS 2.54mm VERT_Thru Hole", Supplier Part Number 1=1462926, Storage Location="ECE Dept Store", Supplier="ECE Dept", Supplier 1=Farnell
H9: library part JA_MOLEX_KK_8POS, "CONN HEADER 8POS 2.54mm VERT_Thru Hole", Supplier Part Number 1=1756826, Storage Location="ECE Dept Store", Supplier="ECE Dept", Supplier 1=Farnell
L1 L2: library part IN_Ferrite-Bead, "Ferrite Bead, Rdc 0.3R, Z100MHZ 600R, Imax 1A, SMD 1206", DC Current Rating=1, DC Resistance Max=0.08, Ferrite Case Style="1206 ^3216 Metric]", Frequency Range="50MHz to 1", Impedance Tolerance="± 25%", Manufacturer=FAIR-RITE, Manufacturer Part Number=2512066017Y1, Supplier Part Number 1=1612060, Ferrite Mounting=SMD, Impedance=600, Manufacturer PN=2512066017Y1, Storage Location="PCB Assembly WS", Supplier="ECE Dept", Supplier 1=Farnell
L3: library part CDRH104RNP-5R2NC, "FIXED IND 5.2UH 6A 22 MOHM SMD", Current - Saturation=5.6A, DC Resistance (DCR)="22 mOhm Max", Frequency - Self Resonant=-, Manufacturer="Sumida America Components Inc.", Operating Temperature="-40°C ~ 100°C", Package / Case=Nonstandard, Supplier Part Number 1=308-2280-1-ND, Tolerance=±30%, Category="Inductors, Coils, Chokes", ComponentLink1Description=http://products.sumida.com/products/pdf/CDRH104R.pdf, ComponentLink1URL=http://products.sumida.com/products/pdf/CDRH104R.pdf, Height - Seated (Max)="0.157\" (4.00mm)", Manufacturer Part Number=CDRH104RNP-5R2NC, Material - Core=Ferrite, Mounting Type="Surface Mount", Packaging="Cut Tape (CT)", Part Status=Active, Pricing 1="1=2.9, 10=2.678, 100=1.8743, 500=1.5173 (NZD)", Q @ Freq=-, Ratings=-, RoHS="RoHS Compliant", Shielding=Shielded, Size / Dimension="0.402\" L x 0.394\" W (10.20mm x 10.00mm)", Stock 1=3849, Supplier 1=Digi-Key, Supplier Device Package=-, Type=-
Q1 Q2 Q3: library part TM_SSM3J328R, "MOSFET P-CH 20V 6A SOT23-3", Case/Package=SOT-23-3, Continuous Drain Current (ID)=6A, Drain to Source Breakdown Voltage=-20V, Drain to Source Resistance=47.4mR, Drain to Source Voltage (Vdss)=20V, Gate to Source Voltage (Vgs)=8V, Input Capacitance=840pF, Input Capacitance (Ciss) @ Vds="840pF @ 10V", Manufacturer=Toshiba, Max Operating Temperature=150°C, Max Power Dissipation=1W, Min Operating Temperature=-55°C, Package / Case="SOT-23-3 Flat Leads", Package Quantity=3000, Power Dissipation=2W, Supplier Device Package=SOT-23F, Supplier Part Number=SSM3J328RLFDKR-ND, ComponentLink1Description=https://datasheet.ciiva.com/11158/ssm3j328r-datasheet-en-20140301-11158652.pdf, ComponentLink1URL=https://datasheet.ciiva.com/11158/ssm3j328r-datasheet-en-20140301-11158652.pdf, Current - Continuous Drain (Id) @ 25° C=6A, Element Configuration=Single, FET Feature="Logic Level Gate, 1.5V Drive", FET Type="MOSFET P-Channel, Metal Oxide", Gate Charge (Qg) @ Vgs="12.8nC @ 4.5V", Manufacturer Part Number=SSM3J328R,LF, Mount="Surface Mount", Number of Channels=1, Number of Elements=1, Number of Pins=3, Packaging="Tape and Reel", Power - Max=1W, Pricing="1=0.79, 10=0.658, 25=0.5772, 100=0.4939, 250=0.42836, 500=0.36284, 1000=0.27972 (NZD)", Radiation Hardening=No, Rds On Max=29.8mR, Storage Location="PCB Assembly WS", Supplier=Digi-Key, Supplier 1=Digi-Key, Supplier Part Number 1=SSM3J328RLFDKR-ND, Turn-Off Delay Time=107ns, Turn-On Delay Time=32ns, Vgs(th) (Max) @ Id="1V @ 1mA"
R1: library part RS_27K, "RES 27K OHM 1/10W 5% 0603 SMD", Storage Location="PCB Assembly WS", Supplier="ECE Dept"
R2: library part RS_47K, "RES 47.0K OHM 1/10W 5% 0603 SMD", Storage Location="PCB Assembly WS", Supplier="ECE Dept"
R3 R4: library part RS_27R, "RES 27 OHM 1/10W 5% 0603 SMD", Storage Location="PCB Assembly WS", Supplier="ECE Dept"
R6: library part RS_820R, "RES 820 OHM 1/10W 5% 0603 SMD", Storage Location="PCB Assembly WS", Supplier="ECE Dept"
R7: library part RT_1R, "RES 1R OHM 1/4W 5% 1206 SMD", Storage Location="PCB Assembly WS", Supplier="ECE Dept"
R8 R10 R11 R16 R17: library part RS_0R0, "RES 0.0 OHM 1/10W 5% 0603 SMD", Storage Location="PCB Assembly WS", Supplier="ECE Dept"
R9: library part RS_390R, "RES 390 OHM 1/10W 5% 0603 SMD", Storage Location="PCB Assembly WS", Supplier="ECE Dept"
R12: library part RS_4K7, "RES 4.7K OHM 1/10W 5% 0603 SMD", Storage Location="PCB Assembly WS", Supplier="ECE Dept"
R13: library part RS_3K3, "RES 3.3K OHM 1/10W 5% 0603 SMD", Storage Location="PCB Assembly WS", Supplier="ECE Dept"
R14: library part RS_270R, "RES 270 OHM 1/10W 5% 0603 SMD", Storage Location="PCB Assembly WS", Supplier="ECE Dept"
S1 S2: library part WS_EVQPNF05M, "Panasonic 6 x 3.5mm SMD Light Touch Switch Type SMD", Manufacturer=Panasonic, Manufacturer PN=EVQPNF05M, Supplier Part Number 1=2079481, PackageDescription="6.0 x 3.5 mm", Storage Location="PCB Assembly WS", Supplier="ECE Dept", Supplier 1=Farnell, Supplier 2=Digi-Key, Supplier Part Number 2=P13598SCT-ND
U1: library part SE_ATSAM4S16BA-MU, "IC MCU 32BIT 512KB FLASH 64LQFP", Manufacturer=Atmel, Package / Case=64-LQFP, Supplier Part Number 1=ATSAM4S8BA-ANRCT-ND, Voltage - Supply (Vcc/Vdd)="1.62 V ~ 3.6 V", Code_JEDEC=MO-220VMMD-3, ComponentLink1Description="Manufacturer URL", ComponentLink1URL=http://www.atmel.com/, ComponentLink2Description="SAM4S Series Datasheet", ComponentLink2URL=http://www.atmel.com/dyn/resources/prod_documents/11100.pdf, ComponentLink3Description="SAM4S Series Summary", ComponentLink3URL=http://www.atmel.com/dyn/resources/prod_documents/11100S.pdf, Connectivity="I²C, IrDA, Memory Card, SPI, SSC, UART/USART, USB", Core Processor="ARM® Cortex®-M4", Core Size=32-Bit, Data Converters="A/D 11x12b, D/A 2x12b", Manufacturer Part Number=ATSAM4S8BA-ANR, Number of I/O=47, PackageDescription="64-Pin Quad Flat No-Lead (QFN) Sawn, 9 x 9 x 1.0 mm Body, 0.5 mm Pitch, Exposed Pad", PackageReference=64PS, PackageVersion="revJ, Jul-2007", Packaging="Cut Tape (CT)", Peripherals="Brown-out Detect/Reset, DMA, POR, PWM, WDT", Program Memory Size="512KB (512K x 8)", Program Memory Type=FLASH, RAM Size="128K x 8", Speed=120MHz, Supplier 1=Digi-Key
U2 U3: library part SV_CAT6219-330TDGT3, "IC REG LIN 3.3V 500MA TSOT23-5", Base Part Number=CAT6219, Current - Output=500mA, Package / Case="SOT-23-5 Thin, TSOT-23-5", Supplier Device Package=TSOT-23-5, Supplier Part Number=CAT6219-330TDGT3CT-ND, Voltage - Input (Max)=5.5V, Voltage - Output (Min/Fixed)=3.3V, Voltage Dropout (Max)="0.5V @ 500mA", ComponentLink1Description=http://www.onsemi.com/pub/Collateral/CAT6219-D.PDF, ComponentLink1URL=http://www.onsemi.com/pub/Collateral/CAT6219-D.PDF, Manufacturer Part Number=CAT6219-330TDGT3, Supplier=Digi-Key, Supplier 1=Digi-Key
U4: library part NRF24, "nRF24 SMD Module", Warning="No power planes near or under device"
U5: library part ADP2302ARDZ-5.0-R7, "IC REG BUCK 5V 2A 8SOIC", Current - Output=2A, Frequency - Switching=700kHz, Supplier Part Number 1=ADP2302ARDZ-5.0-R7CT-ND, Voltage - Input (Max)=20V, Voltage - Output (Min/Fixed)=5V, Manufacturer_Part_Number=ADP2302ARDZ-5.0-R7, Output Type=Fixed, Supplier 1=Digi-Key, Type=DEV, Vendor="Analog Devices Inc"
U6: "Dual H-Bridge Motor Driver 1.5A"
U7: "1.8V - 5V level converter"
Y1: library part XT_CRYSTAL_12MHz_18pF, "CRYSTAL 12MHZ 18PF 6X3.5mm SMD", ESR (Equivalent Series Resistance)="60 Ohm", Frequency Stability=±50ppm, Frequency Tolerance=±30ppm, Load Capacitance=18pF, Manufacturer="CTS-Frequency Controls", Manufacturer Part Number=406C35D12M00000, Operating Mode=Fundamental, Operating Temperature="-20°C ~ 70°C", Package / Case="4-SMD, No Lead (DFN, LCC)", Supplier Part Number 1=CTX855CT-ND, Frequency=12MHz, Height="0.047\" (1.20mm)", Mounting Type="Surface Mount", Size / Dimension="0.236\" L x 0.138\" W (6.00mm x 3.50mm)", Supplier 1=Digi-Key

## Via types
v1: diameter 1, hole 0.5, Top Side to Bottom Side, 79 vias
v2: diameter 0.9, hole 0.5, Top Side to Bottom Side, 3 vias
v3: diameter 2, hole 1.5, Top Side to Bottom Side, 1 vias
v4: diameter 2.2, hole 1.6, Top Side to Bottom Side, 1 vias

## Nets (pads, with @x,y where several pads share a name; then routed paths per layer and width w, separated by ;. In a path a pad name is that pad's centre, name@x,y a point inside that pad or via, vN(x,y) a via of type N, cw(c..) or ccw(c..) an arc to the next point about the centre after c; other vN are vias at no path point)
3V3: C4.2 C6.2 C8.2 C10.2 C12.2 C15.2 C17.2 H2.7 H2.8 H9.6 R8.2 R16.2 TP1.1 U1.1 U1.7 U1.18 U1.45 U1.58 U2.5 | length 24.6
  Top Side w0.3: v1(24.9,63.6) 25.175,63.325 25.925,63.325 26.05,63.2 26.1,63.25 U1.18 ; U1.7 32.75,64.49 33.34,63.9 v1(33.5,63.9) ; v1(33.5,56) 33.689,56 34.179,55.51 34.25,55.51 U1.45 ; U1.1 35.8,65.475 v1(35.8,63.8) ; v1(35.9,60.6) 36.025,60.725 37.5,60.725 U1.58
  Top Side w0.5: R8.2 42.8,77.5 42.8,76.935 42.9,76.835 v1(42.9,76.7)
  Top Side w0.6: U2.5 v1@11.675,55.475
  Top Side w1: C17.2 v1(9.5,54.9)
  Top Side w1.3: v1@11.675,55.475 v1(11.7,55.5) ; TP1.1 v1(13.7,57.4) ; v1(15.9,54.8) 15.9,54.6 15.95,54.55 R16.2 ; C15.2 30.296,68.804 v1(30.3,68.8)
  Bottom Side w0.3: v1(24.9,63.6) 25.089,63.6 25.389,63.3 26.3,63.3 26.4,63.2 C6.2 ; v1(33.5,56) 33.5,54.625 C8.2 ; C4.2 v1(33.5,63.9) ; v1(35.8,63.8) 35.934,63.934 36.434,63.934 C12.2 ; v1(35.9,60.6) 37.375,60.6 C10.2
3V3_RADIO: C19.2 L2.2 TP25.1 U3.5 | length 10
  Top Side w0.3: 2.775,57.925 3.225,57.925 4.2,58.9 TP25.1
  Top Side w1.3: C19.2 2.296,54.5 3.6,54.5 U3.5 3.75,56.95 2.775,57.925 L2.2
5V: C23.2 C25.2 C26.2 H8.1 H9.8 L3.2 R10.2 R11.2 R17.2 TP11.1 U5.5 | length 12.1
  Top Side w1: v1(2.9,46.2) R11.2 ; v1(5.2,42.6) TP11.1 ; v1(10.8,46.8) 10.8,47.05 R10.2 ; v1(16.6,46.7) R17.2
  Top Side w1.3: C26.2 C25.2
  Top Side w1.5: U5.5 16.7,27.416 v1(16.7,28.2) ; v1(17.6,35.1) 17.6,36.612 C23.2
  Top Side w2: L3.2 v1(12.3,34.4)
  other v1: 12.7,37.3
5V_USB: H1.1 R1.2 TP18.1 | length 9.4
  Top Side w0.3: R1.2 53.4,63.8 54.3,64.7 TP18.1 56,65 56,65.5 58.541,68.041 H1.1
AOUT1: H5.2 TP9.1 U6.2 | length 12.6
  Top Side w0.5: TP9.1@39,11.9 TP9.1@39.85,11.9 ; 41.65,13.7 U6.2
  Top Side w1: TP9.1@39.85,11.9 41.65,13.7
  Top Side w2: H5.2 35.871,5.591 35.871,8.771 TP9.1@39,11.9
AOUT2: H5.1 TP16.1 U6.4 | length 10.1
  Top Side w0.5: TP16.1 42.95,12.631 U6.4
  Top Side w2: TP16.1 42.5,10.471 43.109,9.862 43.109,5.591 H5.1
BATT_V_DETECT: R12.1 R13.2 TP22.1 U1.11 | length 42.9
  Top Side w0.3: R13.2 20.209,29.9 R12.1 22,29.904 22,33.5 20.3,35.2 20.3,39.7 21.9,41.3 21.9,42.9 TP22.1 24,45 v1(24,52) ; v1(30.7,57.9) 30.7,65.475 U1.11
  Bottom Side w0.3: v1(24,52) 29.766,57.766 30.566,57.766 v1(30.7,57.9)
BOUT1: H6.1 TP23.1 U6.7 | length 19.7
  Top Side w0.5: U6.7 44.9,13.8 45.4,13.3 46.7,13.3
  Top Side w1: 46.7,13.3 47.1,13.7 51.1,13.7 51.1,13.581 52.5,12.181 TP23.1
  Top Side w2: TP23.1 56.3,8.781 56.3,8.69 59.32,5.671 H6.1
BOUT2: H6.2 TP30.1 U6.5 | length 16.2
  Top Side w0.5: U6.5 43.6,13.6 45.3,11.9
  Top Side w1: 45.3,11.9 TP30.1@49.3,11.9
  Top Side w1.6: TP30.1 49.4,12.081 49.4,11
  Top Side w2: 49.4,11 51.509,8.891 51.509,5.64 51.948,5.2 H6.2@51.948,5.471
BRKOUT_1: H9.5 U1.34 | length 15.8
  Top Side w0.3: U1.34 28.75,45.21 H9.5
BRKOUT_2: H9.4 U1.35 | length 13.1
  Top Side w0.3: U1.35 29.25,47.25 H9.4
BRKOUT_3: H9.3 U1.36 | length 10.3
  Top Side w0.3: U1.36 29.75,49.29 H9.3
BRKOUT_4: H9.2 U1.37 | length 7.6
  Top Side w0.3: U1.37 30.25,51.33 H9.2
BRKOUT_5: H9.1 U1.38 | length 5.1
  Top Side w0.3: U1.38 30.75,52.95 32.98,50.72 H9.1
BUMPER: H7.2 TP6.1 U1.43 | length 67.7
  Top Side w0.3: H7.2 TP6.1 ; U1.43 33.25,53.44 35.2,51.49 v1(35.2,30.2)
  Bottom Side w0.3: H7.2 13.6,8.6 v1(35.2,30.2)
D_N: H1.2 R4.1 TP12.1 | length 5.5
  Top Side w0.381: R4.1 54.954,69.354 57.442,69.354 58.105,68.691 H1.2
D_P: H1.3 R3.1 TP5.1 | length 7.3
  Top Side w0.381: R3.1 55.8,72.1 TP5.1 58.4,70.704 58.4,69.6 58.649,69.351 59.77,69.351 H1.3
FREQ1: H4.1 U1.13 | length 16.2
  Top Side w0.3: U1.13 29.75,67.45 29.3,67.9 29.3,73.8 31.48,75.98 H4.1
FREQ2: H4.3 U1.14 | length 16.3
  Top Side w0.3: H4.3 26.4,76.217 28.7,73.917 28.7,67.4 29.25,66.85 U1.14
FREQ3: H4.4 U1.15 | length 17.9
  Top Side w0.3: H4.4 23.86,76.04 25.5,74.4 25.5,68.5 26.5,67.5 27.8,67.5 28.725,66.575 28.725,65.55 U1.15
FREQ4: H4.6 U1.16 | length 20.5
  Top Side w0.3: H4.6 19.039,80.341 19.039,79.361 24,74.4 24,67.9 25.15,66.75 27.714,66.75 28.225,66.239 28.225,65.55 U1.16
G_STATUS: DL2.1 U1.4 | length 20.3
  Top Side w0.3: U1.4 34.3,65.575 34.3,70.9 36.204,72.804 38.029,72.804 40.2,74.976 40.2,81.159 DL2.1
GND: C2.1 C3.1 C4.1 C5.1 C6.1 C7.1 C8.1 C9.1 C10.1 C11.1 C12.1 C14.1 C15.1 C16.1 C17.1 C18.1 C19.1 C20.1 C21.1 C23.1 C24.1 C25.1 C26.1 C27.2 C28.1 C30.1 D4.1 H1.5 H1.6 H2.5 H2.6 H3.1 H3.3 H4.2 H4.5 H7.1 H8.3 H9.7 R2.1 R7.1 R13.1 R14.2 S1.1 S2.1 TP3.1 TP10.1 TP17.1 TP24.1 U1.2 U1.17 U1.46 U1.60 U2.2 U3.2 U4.2 U5.7 U5.EPAD U6.3 U6.6 U6.13 U6.17 U7.2 U7.5 | length 94.6
  Top Side w0.3: U1.17 26.475,64.286 26.8,64.61 v1(26.8,64.8) ; U1.46 34.775,54.5 34.775,55.586 35,55.81 v1(35,56) ; U1.2 35.25,66.561 35.7,67.011 v1(35.7,67.2) ; v1(35.9,62.1) 36.15,62.1 36.5,61.75 U1.60 ; U6.17@42.3,16.825 U6.17@42.575,17.1 ; U6.17@42.95,18.125 v4(43.275,17.8)
  Top Side w0.4: U6.3 U6.17@42.3,16.825 ; U6.17@42.95,18.125 U6.13
  Top Side w0.5: U6.17@43.825,17.25 44.225,16.85 44.225,16.087 44.25,16.062 U6.6 ; H1.6@59.779,71.841 H1.5 62.179,70.641 H1.6@62.479,70.341
  Top Side w0.6: U3.2 v1(4.7,53.1) ; v1(12.6,52.8) 12.6,52.407 12.625,52.382 U2.2 ; U7.2 v2(20.4,49.7) U7.5
  Top Side w1: C19.1 2.4,52.2 3.1,52.9 v1(3.1,52.95) ; v1(2,49.7) 2.25,49.7 C18.1@3,49.7 ; U4.2 3.714,64.086 C21.1 v1(4.9,62.9) ; v1(9.4,49.7) 10.841,49.7 C16.1 ; C17.1 10.3,52.2 v1(10.6,52.5) ; U5.7 16.935,25.111 18.611,25.111 v3(19,25.5) ; R13.1 20.2,32.291 v1(20.2,32.6) ; v1(22.7,70.1) TP24.1 ; v1(23.4,14.3) 23.65,14.3 TP17.1 ; v1(36.2,82.7) 37.45,82.7 S2.1 ; C14.1@37.8,69.1 38.5,69.8 v1(38.5,71.4) 39.896,71.4 R7.1@39.9,71.404 ; C30.1 41,17 41.1,17.1 42.575,17.1 v4(43.275,17.8) ; v1(40.7,39.2) 40.95,39.2 TP10.1 ; C2.1@43.9,69.266 v1(43.9,70.3) ; v1(46.334,65.2) 46.334,64.156 C3.1@46.39,64.1 ; TP3.1 48.05,69.7 v1(48.4,69.7) ; S1.1 49.25,82.8 v1(50.6,82.8) ; R2.1 50.5,65.6 51.2,66.3 v1(51.2,66.5) ; v1(54.4,21) 54.4,21.271 R14.2 ; H1.6@62.479,65.841 62.479,68.341 62.479,70.341 H1.6@62.479,72.841
  Top Side w1.3: v1@12.4,39 C25.1 ; v1(25.4,24.2) 25.4,24.5 C24.1 ; C15.1 27.396,68.804 v1(27.4,68.8) ; v4(43.275,17.8) 43.825,17.25 45.65,17.25 v1(46,16.9) ; v1@46.15,16.95 C28.1 C27.2@49.1,16.95 ; C27.2 50,16.4 v1(50,15.2)
  Top Side w1.5: v1(22.8,35.2) C23.1
  Top Side w2: D4.1 v1(8.1,20.3) ; v1(43.3,34) 44.898,34 C20.1@44.898,33.961
  Bottom Side w0.3: C9.1 v1(28,58.5) ; C7.1 27.792,65.472 27.472,65.472 v1(26.8,64.8) 26.8,64.703 27.423,64.08 27.423,63.977 C6.1 ; C5.1 32.346,60.4 v1(32.5,60.4) 32.634,60.534 32.834,60.534 C4.1 ; v1(35,56) 35,54.725 C8.1 ; v1(35.7,67.2) 35.7,67.026 36.426,66.3 C12.1@37,66.3 ; v1(35.9,57) 37.475,57 C11.1 ; v1(35.9,62.1) 37.475,62.1 C10.1
  other v1: 12.7,39
LED_COM: TP29.1 U1.29 U7.4 | length 10.6
  Top Side w0.3: U7.4 21.3,51.054 TP29.1 21.3,55.5 23.55,57.75 U1.29
MISO: TP14.1 U1.27 U4.7 | length 20.5
  Top Side w0.3: U4.7 10.071,64.9 10.771,64.2 14,64.2 TP14.1 19.45,58.75 U1.27
MOSI: TP7.1 U1.22 U4.6 | length 21.5
  Top Side w0.2: U4.6 8.8,67.2 9.5,67.9 14.4,67.9
  Top Side w0.3: 14.4,67.9 14.9,67.4 TP7.1 24.65,61.25 U1.22
MOT_A1: TP34.1 U1.32 U6.16 | length 45
  Top Side w0.3: U1.32 26.475,29.362 31.337,24.5 35.237,20.6 U6.16
MOT_A2: TP35.1 U1.33 U6.15 | length 41.8
  Top Side w0.3: U1.33 28.25,53.75 27.7,53.2 27.7,31.991 33.991,25.7 37.191,22.5 40.4,22.5 41.65,21.25 U6.15
MOT_B1: TP8.1 U1.48 U6.9 | length 44.7
  Top Side w0.3: U1.48 35.75,53.35 36,53.1 38.85,53.1 39.3,52.65 39.3,28 40.5,26.8 46.5,26.8 47.4,25.9 47.4,23.7 45.55,21.85 U6.9
MOT_B2: TP15.1 U1.47 U6.10 | length 42.9
  Top Side w0.3: U1.47 35.25,53.15 35.9,52.5 37.3,52.5 38,51.8 38,30.3 36.646,28.946 36.646,26.8 39.546,23.9 44.5,23.9 45.1,23.3 45.1,21.862 44.9,21.662 U6.10
MOT_SLEEP: TP28.1 U1.31 U6.1 | length 51.8
  Top Side w0.3: U1.31 26.45,56.725 25.425,56.725 25.2,56.5 25.2,28.124 28.683,24.641 28.683,23.3 36.983,15 U6.1
Net1_1: 1.1 H3.2 Q1.3 Q2.3 Q3.3 | length 8.1
  Top Side w0.3: 1.1 47.2,37.1 48.819,35.481 H3.2@50.654,35.481
  Top Side w1.5: Q3.3 52.291,30.191 v1(52.3,30.2) ; Q2.3 56.396,29.942 56.4,29.946 v1(56.4,30.3) ; Q1.3 60.5,29.95 v1(60.5,30.3)
Net2_1: 2.1 C20.2 D2.1 F1.1 F2.1 Q1.2 Q2.2 Q3.2 | length 10.9
  Top Side w0.8: v1(53.2,25.8) 53.221,25.821 53.221,26.929 Q3.2 ; v2(56.6,26.9) Q2.2@57.296,26.9 ; v2(60.7,26.925) 60.712,26.937 61.437,26.937 Q1.2
  Top Side w1: v1@56.296,17.7 2.1
  Top Side w1.8: F2.1@44.9,25.34 45.86,25.34 45.9,25.3 v1(46.1,25.3) ; C20.2@44.931,28.816 45.015,28.9 v1(46.5,28.9)
  Top Side w2: v1(57,21.9) D2.1
  other v1: 56.6,17.7
NetC2_2: C2.2 U1.62 Y1.3 | length 9.6
  Top Side w0.3: U1.62 39.35,62.75 42.3,65.7 C2.2@42.3,69.266
NetC3_2: C3.2 U1.61 Y1.1 | length 10
  Top Side w0.3: U1.61 40.255,62.25 40.995,61.51 43.45,61.51 44.7,62.76 44.96,62.5 C3.2 C3.2@46.556,62.5
NetC5_2: C5.2 C7.2 C9.2 C11.2 L1.2 U1.8 U1.12 U1.24 U1.54 | length 32.7
  Top Side w0.3: U1.24 26.5,60.225 27.485,60.225 27.81,59.9 v1(28.2,59.9) ; U1.12 30.25,66.75 30.7,67.2 32.25,67.2 ; v1(31.7,63.9) 31.7,63.94 32.25,64.49 U1.8 32.25,67.2 ; L1.2@32.5,68.8 32.25,68.55 32.25,67.2 ; v1(35.8,58.9) 35.925,58.775 37.5,58.775 U1.54
  Bottom Side w0.3: C9.2 26.7,59.9 v1(28.2,59.9) ; C5.2 31.7,62.954 v1(31.7,63.9) ; v1(35.8,58.9) 36.089,58.9 36.439,58.55 C11.2
  Bottom Side w1: v1(28.2,59.9) 28.2,60.1 29.446,61.346 ; C7.2 29.446,62.8 ; C5.2 29.446,62.8 ; v1(35.8,58.9) 31.891,58.9 29.446,61.346 ; 29.446,61.346 29.446,62.8
NetC13_1: C13.1 R7.2 | length 2.2
  Top Side w0.3: C13.1@39.479,66.5 39.9,66.921 R7.2@39.9,68.504
NetC13_2: C13.2 C14.2 L1.1 U1.64 | length 9
  Top Side w0.3: L1.1@35.808,68.662 L1.1@35.808,69.012 ; U1.64 38.15,63.75 U1.64@38.2,63.8
  Top Side w0.5: L1.1@35.7,68.8 35.875,68.625 36.75,67.75 37.55,67.75 37.8,67.5 37.8,65.775 38.537,65.038 ; U1.64@38.2,63.8 38.2,64.7 38.537,65.038 ; C13.2 39.517,65.038 38.537,65.038
NetC16_2: C16.2 R10.1 U2.1 U2.3 | length 6.4
  Top Side w0.5: U2.1 11.675,50.584 C16.2 13.554,50.813 13.575,50.813 U2.3
  Top Side w1: R10.1 C16.2
NetC18_2: C18.2 R11.1 U3.1 U3.3 | length 5.6
  Top Side w0.5: U3.1@3.754,51.156 3.754,50.546 4.6,49.7 5.654,50.754 U3.3@5.654,51.156
  Top Side w1.3: R11.1@4.6,47.8 C18.2@4.6,49.7
NetC21_2: C21.2 L2.1 U4.1 | length 5
  Top Side w1: L2.1 2.2,61.9 2.2,63.6 C21.2 2.443,63.843 U4.1
NetC22_1: C22.1 U5.1 | length 2.8
  Top Side w0.8: C22.1 19.8,22.477 20.918,23.595 U5.1
NetC22_2: C22.2 D4.2 L3.1 U5.8 | length 14.7
  Top Side w0.8: U5.8 17.082,23.595 18.1,22.577 18.1,21.8 C22.2
  Top Side w1: D4.2 14.667,21.7 C22.2
  Top Side w2: L3.1 10.467,25.2 13.067,22.6 13.067,20.5 D4.2
NetC29_1: C29.1 U6.11 | length 2
  Top Side w0.4: C29.1@44.2,22.6 44.25,22.55 U6.11
NetC30_2: C30.2 U6.14 | length 4.1
  Top Side w0.4: 41.1,18.6 42.3,19.8 U6.14
  Top Side w1: C30.2 41.1,18.6
NetD2_2: D2.2 Q1.1 Q2.1 Q3.1 R14.1 | length 25.9
  Top Side w0.3: Q3.1 52.291,27.9 55.5,27.9 ; R14.1 56.379,25.65 60.2,25.65 ; Q2.1 55.5,27.004 55.5,27.9 ; Q1.1 59.6,27 59.6,27.9 ; D2.2 60.2,25.65 ; 55.5,27.9 59.6,27.9 ; 59.6,27.9 61.874,27.9 62.15,27.624 62.15,25.75 62.05,25.65 60.2,25.65
NetDL1_2: DL1.2 R6.1 | length 1.6
  Top Side w0.3: DL1.2 45.632,80.371 R6.1
NetDL2_2: DL2.2 R9.2 | length 1.8
  Top Side w0.3: DL2.2 42.521,80.371 R9.2
NetH8_2: H8.2 U7.3 | length 56.6
  Top Side w0.3: H8.2 5.94,11.76 3.8,13.9 3.8,34 10.2,40.4 15.2,40.4 21.35,46.55 U7.3
NetR3_2: R3.2 U1.57 | length 22.1
  Top Side w0.3: U1.57 45.73,60.25 47.6,62.12 47.6,65.2 R3.2@53.4,71
NetR4_2: R4.2 U1.56 | length 21.6
  Top Side w0.3: U1.56 45.867,59.75 48.05,61.933 48.05,65.014 52.136,69.1 R4.2@53.4,69.1
NetR6_2: R6.2 R8.1 R9.1 | length 9.7
  Top Side w0.3: R9.1 43.55,83.1 44.962,83.1 R6.2 46.612,81.45 46.612,79.976 45.787,79.151 45.751,79.151 R8.1
NetR16_1: R16.1 U7.6 | length 3.4
  Top Side w0.5: R16.1 19.45,51.9 U7.6
NetR17_1: R17.1 U7.1 | length 2
  Top Side w0.6: R17.1 19.45,46.85 U7.1
NetTP2_1: TP2.1 U1.55 | length 13.7
  Top Side w0.3: U1.55 37.55,59.225 38.775,59.225 40,58 TP2.1
nRF24_CE: TP20.1 U1.25 U4.3 | length 26.2
  Top Side w0.3: U4.3@5.286,66.1 U4.3 4.986,64.9 7.186,62.7 v1(7.2,62.7) ; v1(24.9,60.3) 25.45,59.75 U1.25
  Bottom Side w0.3: v1(7.2,62.7) 17.7,62.7 TP20.1 21.6,63.5 24.8,60.3 v1(24.9,60.3)
nRF24_CS: TP13.1 U1.28 U4.4 | length 24.5
  Top Side w0.3: U4.4 6.257,64.9 9.957,61.2 TP13.1 15.05,58.25 U1.28
nRF24_IRQ: TP27.1 U1.26 U4.8 | length 18.1
  Top Side w0.3: U4.8 15.6,66.4 TP27.1 22.75,59.25 U1.26
nRST: H2.1 S1.2 TP33.1 U1.39 | length 80.9
  Top Side w0.3: U1.39 31.275,54.45 31.275,53.225 31.466,53.034 32.216,53.034 v1(32.35,52.9) ; TP33.1 49.2,74.3 S1.2 50.95,78.25 v1(51,78.3)
  Bottom Side w0.3: v1(32.35,52.9) 34.2,52.9 42.8,44.3 58.257,44.3 60,46.043 61.125,47.168 61.125,74.375 57.2,78.3 v1(51,78.3)
R_STATUS: DL1.1 U1.3 | length 22.1
  Top Side w0.3: U1.3 34.75,70.65 36.454,72.354 39.354,72.354 41.5,74.5 41.5,77.976 43.5,79.976 43.5,81.215 DL1.1
SCK: TP21.1 U1.21 U4.5 | length 27.1
  Top Side w0.2: U4.5 7.529,67.9 8.029,68.4 12.2,68.4 12.225,68.375 13.575,68.375 14,68.8
  Top Side w0.3: 14,68.8 16.3,71.1 TP21.1 22.285,67.315 22.285,64.883 25.393,61.775 26.45,61.775 U1.21
SLEEP: S2.2 TP32.1 U1.5 | length 15.2
  Top Side w0.3: U1.5 33.75,71.95 35.9,74.1 TP32.1 S2.2
SWCLK: H2.2 TP19.1 U1.53 | length 29.3
  Top Side w0.3: U1.53 38.814,58.25 44.364,52.7 51.9,52.7 55,52.7 55.3,52.4 57.2,52.4 58,51.6 58,47.16 H2.2@56.86,46.02
SWDIO: H2.4 TP26.1 U1.51 | length 23.5
  Top Side w0.3: U1.51 38.75,57.25 46.2,49.8 51.9,49.8 53.118,48.583 H2.4@57.46,48.583
USB_DETECT: R1.1 R2.2 TP36.1 U1.59 | length 19.3
  Top Side w0.3: U1.59 37.575,61.2 v1(39.4,61.2) ; v1(48.9,60.6) 48.954,60.654 TP36.1 50.5,60.854 R2.2 50.716,63.8 R1.1
  Bottom Side w0.3: v1(39.4,61.2) 39.544,61.2 40.144,60.6 v1(48.9,60.6)
V_BATT: C24.2 F2.2 R12.2 U5.2 U5.3 | length 5.4
  Top Side w1: U5.2 21.505,24.865 22.14,25.5 21.505,26.135 U5.3 ; v1(23.7,28.9) 23.7,29 23.704,29.004 R12.2
  Top Side w1.5: v1(22.6,25.5) C24.2@23.6,25.5
  Top Side w1.8: v1(40.8,25.3) 41.96,25.3 F2.2@42,25.34
V_MOT: C27.1 C28.2 C29.2 F1.2 U6.12 | length 12.2
  Top Side w0.4: v1(41.6,22.7) C29.2 42.7,22.7 43.6,21.8 U6.12 43.6,19.38 45.357,19.38 45.838,18.9 v1(46,18.9)
  Top Side w1: v1(46,18.9) 46.1,18.8 47.129,18.8 C28.2
  Top Side w1.3: C27.1 51.146,19.3 52.496,17.95 F1.2
  other v1: 51.5,19.1
pads on no net: H1.4 H2.3 H2.9 H2.10 U1.6 U1.9 U1.10 U1.19 U1.20 U1.23 U1.30 U1.40 U1.41 U1.42 U1.44 U1.49 U1.50 U1.52 U1.63 U2.4 U3.4 U5.4 U5.6 U6.8 Y1.2 Y1.4

## Polygon pours and split planes (outlines as drawn)
GND on Top Side (solid, remove dead copper, pour order 8): 0,85 64,85 64,0 0,0
GND on Bottom Side (solid, remove dead copper, pour order 10): 0,85 64,85 64,0 0,0
Net2_1 on Power Plane (split plane): 51.008,28.008 51.05,27.98 51.1,27.971 63.49,27.971 63.49,14.429 55.929,14.429 55.88,14.42 55.87,14.413 54.129,16.154 54.129,19.5 54.12,19.55 54.092,19.592 49.692,23.992 49.65,24.02 49.6,24.029 43.529,24.029 43.529,31.071 47.946,31.071
Net1_1 on Power Plane (split plane): 63.49,28.229 51.154,28.229 48.129,31.254 48.129,34.6 48.12,34.65 48.092,34.692 45.629,37.154 45.629,40.146 46.154,40.671 63.49,40.671
V_MOT on Power Plane (split plane): 53.871,19.446 53.871,16.1 53.88,16.05 53.908,16.008 55.708,14.208 55.75,14.18 55.8,14.171 55.85,14.18 55.865,14.191 55.88,14.18 55.929,14.171 63.49,14.171 63.49,0.51 31.829,0.51 31.829,14.246 41.354,23.771 49.546,23.771
V_BATT on Power Plane (split plane): 43.271,24.029 41.3,24.029 41.25,24.02 41.208,23.992 31.608,14.392 31.58,14.35 31.576,14.329 27.554,14.329 18.329,23.554 18.329,27.146 22.254,31.071 43.271,31.071
3V3 on Power Plane (split plane): 63.49,40.929 46.1,40.929 46.05,40.92 46.008,40.892 45.408,40.292 45.38,40.25 45.371,40.2 45.371,37.1 45.38,37.05 45.408,37.008 47.871,34.546 47.871,31.329 43.4,31.329 38.129,31.329 38.129,33.8 38.12,33.85 38.092,33.892 34.992,36.992 34.95,37.02 34.9,37.029 31.654,37.029 29.329,39.354 29.329,42.9 29.32,42.95 29.292,42.992 22.192,50.092 22.15,50.12 22.1,50.129 17.354,50.129 14.392,53.092 14.35,53.12 14.3,53.129 7.629,53.129 7.629,57.446 16.992,66.808 17.02,66.85 17.029,66.9 17.029,84.49 63.49,84.49
no net on Power Plane (split plane): 16.771,66.954 7.408,57.592 7.38,57.55 7.371,57.5 7.371,53.129 0.51,53.129 0.51,84.49 16.771,84.49
5V on Power Plane (split plane): 17.208,49.908 17.25,49.88 17.3,49.871 22.046,49.871 29.071,42.846 29.071,39.3 29.08,39.25 29.108,39.208 31.508,36.808 31.55,36.78 31.6,36.771 34.846,36.771 37.871,33.746 37.871,31.329 22.2,31.329 22.15,31.32 22.108,31.292 18.108,27.292 18.08,27.25 18.071,27.2 18.071,23.5 18.08,23.45 18.108,23.408 27.408,14.108 27.45,14.08 27.5,14.071 31.571,14.071 31.571,0.51 0.51,0.51 0.51,52.871 14.246,52.871